# Altium PCB STM8S207R8T6 Header Board.PcbDoc
Units mm, origin at the board's own origin, x right, y up, seen from the top; angles counter-clockwise.
Board outline 46.51 x 76.43 mm, 2 copper layers (Top Layer, Bottom Layer); 32 components, 65 nets, 209 pads, 47 vias.
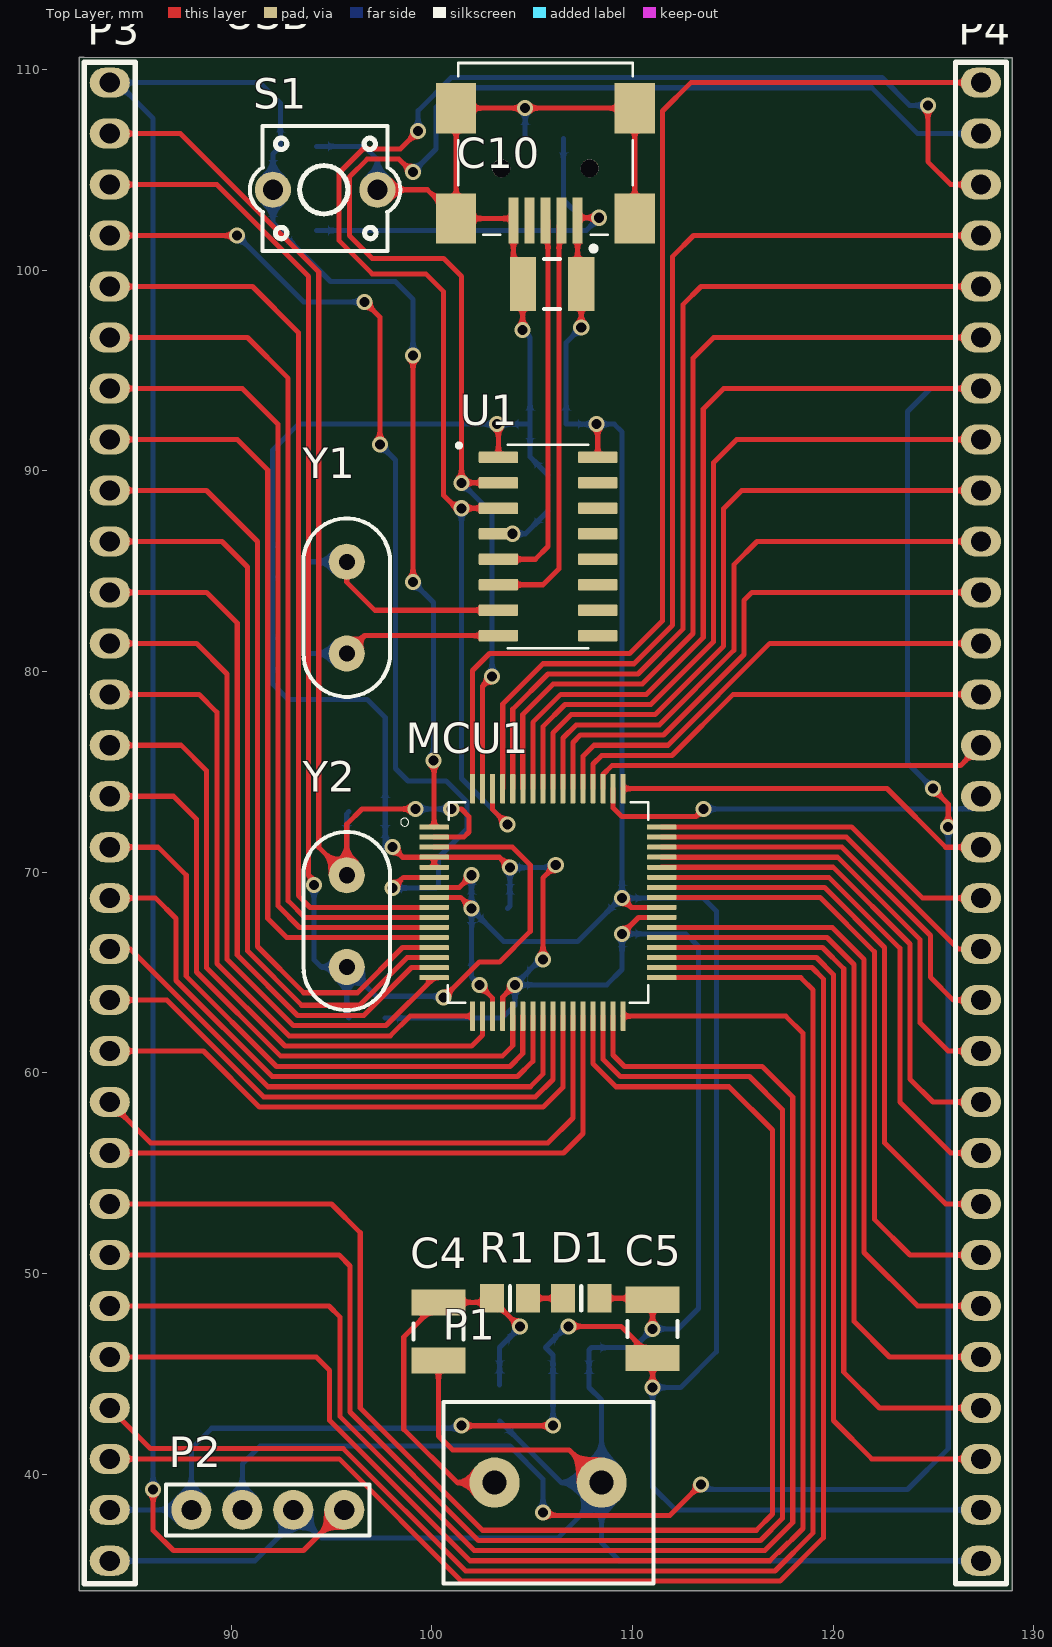
[diagram p0: Top Layer view]
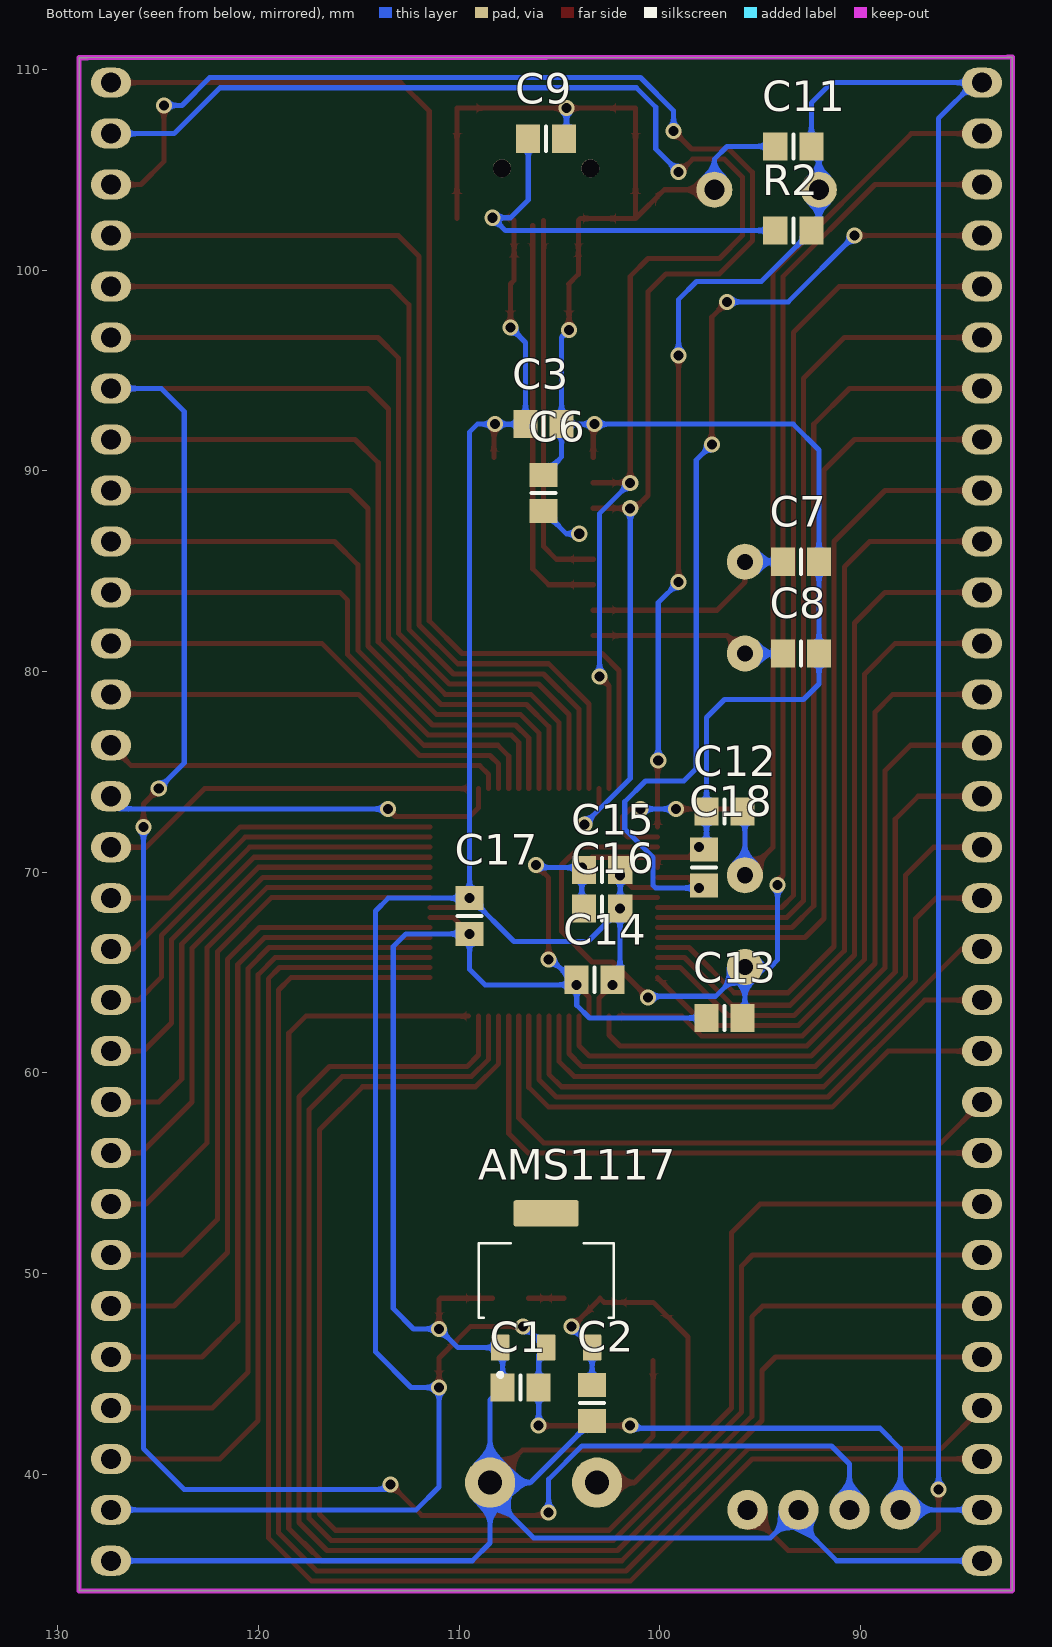
[diagram p1: Bottom Layer view, seen from below]

## Layer stack, top to bottom
Top Solder: solder mask 0.0102, Solder Resist, Dk 3.5
Top Layer: signal copper 0.0356
Dielectric 1: dielectric 0.32, FR-4, Dk 4.8
Bottom Layer: signal copper 0.0356
Bottom Solder: solder mask 0.0102, Solder Resist, Dk 3.5

## Board outline
82.423,34.219 82.451,34.191 128.933,34.191 128.933,110.589 128.524,110.589 82.677,110.617 82.423,110.617

## Design rules (kind name [scope] priority, off if disabled: settings)
Clearance [All] p1: gap=0.254 ignorepadtopadclearanceinfootprint=FALSE except(0: Arc-Hole Track-Hole SMDPad-Hole THPad-Hole Via-Hole Fill-Hole Poly-Hole Region-Hole Text-Hole)
PolygonConnect [All] p1: connectstyle=Relief reliefconductorwidth=0.254 reliefentries=4 polygonreliefangle="90 Angle" airgapwidth=0.254
RoutingVias [All] p1: holewidth=0.5 width=0.8 viastyle="Through Hole" minholewidth=0.5 minwidth=0.8 maxholewidth=0.8 maxwidth=1
SolderMaskExpansion [All] p1: expansion=0.102
UnRoutedNet [All] p1: checkbadconnections=TRUE
Width [All] p1: maxlimit=0.254 minlimit=0.254 preferedwidth=0.254
29 further rules are at their usual default settings.

## Components (designator, comment, footprint, x,y, rotation, side; value= is the part's Value field where it differs from the comment)
AMS1117 "AMS1117" SOT229P700X180-4N 105.664,49.657 r90 bottom
C1 "Cap" 6-0805_N 106.934,44.323 r180 bottom value=100nF
C2 "Cap" 6-0805_N 103.378,43.55 r90 bottom value=100nF
C3 "Cap" 6-0805_N 105.791,92.329 r180 bottom value=100nF
C4 "Cap Pol1" C1210_N 100.33,47.117 r270 top value=100uF
C5 "Cap Pol1" C1210_N 110.998,47.244 r90 top value=100uF
C6 "Cap" 6-0805_N 105.791,88.9 r270 bottom value=10nF
C7 "Cap" 6-0805_N 92.964,85.471 r0 bottom value=18pF
C8 "Cap" 6-0805_N 92.964,80.899 r0 bottom value=18pF
C9 "Cap" 6-0805_N 105.664,106.553 r0 bottom value=10nF
C10 "Cap Pol1" C1210_N 105.992,99.314 r180 top value=10uF
C11 "Cap" 6-0805_N 93.345,106.172 r180 bottom value=100nF
C12 "Cap" 6-0805_N 96.774,73.025 r180 bottom value=100pF
C13 "Cap" 6-0805_N 96.774,62.738 r180 bottom value=100pF
C14 "Cap" 6-0805_N 103.251,64.643 r0 bottom value=100nF
C15 "Cap" 6-0805_N 102.87,70.104 r0 bottom value=100nF
C16 "Cap" 6-0805_N 102.87,68.199 r180 bottom value=100nF
C17 "Cap" 6-0805_N 109.474,67.818 r270 bottom value=100nF
C18 "Cap" 6-0805_N 97.79,70.231 r90 bottom value=680nF
D1 "LED0" 6-0805_N 107.442,48.768 r0 top
MCU1 "STM8S207R8T6" QFP50P1200X1200X160-64N 105.779,68.498 r0 top
P1 "Header 2" Terminal2 105.664,39.497 r90 top
P2 "Header 4" HDR1X4 95.631,38.227 r180 top
P3 "Header 30" "Header 30" 84.582,72.009 r0 top
P4 "Header 30" "Header 30" 127.991,72.009 r0 top
R1 "Res1" 6-0805_N 103.886,48.768 r0 top value=1K
R2 "Res1" 6-0805_N 93.345,101.981 r0 bottom value=10K
S1 "SW-PB" RES_B 94.615,104.013 r180 top
U1 "CH340G" SOIC127P600X175-16N 105.791,86.233 r0 top
USB "Header 5" TE_3-1734035-2 105.659,105.077 r180 top
Y1 "XTAL" Xtal 93.434,87.251 r270 top
Y2 "XTAL" Xtal 93.434,71.63 r270 top

## Footprints (in the part's own frame and the unit in brackets; to place one, negate y for a bottom-side part, rotate by r counter-clockwise, add the part's x,y. Pads: shape width x height; smd on the part's side, far side on the other; paste and mask are expansions set on the pad)
6-0805_N [mm] "Chip Resistor, Body 2.0x1.2mm, IPC Medium Density"
  rect 1.2x1.4 smd: 1(-0.9,0) 2(0.9,0)
  silkscreen extent 0,-0.6 0,0.6, body extent -1.07,-0.7 1.07,0.7, height 0.7
C1210_N [mm] "Chip Capacitor, Body 3.2x2.5mm, IPC Medium Density"
  rect 1.3x2.7 smd: 1(-1.45,0) 2(1.45,0)
  silkscreen extent -0.4,-1.25 0.4,1.25, body extent -1.7,-1.35 1.7,1.35, height 1.5
HDR1X4 [mm] "Connector; Header; 4 Position"
  round 2 hole 1: 1(0,0) 2(2.54,0) 3(5.08,0) 4(7.62,0)
  silkscreen extent -1.27,-1.27 8.89,1.27
"Header 30" [mm]
  oval 2x1.5 hole 1: 1(-0.635,37.338) 2(-0.635,34.798) 3(-0.635,32.258) 4(-0.635,29.718) 5(-0.635,27.178) 6(-0.635,24.638) 7(-0.635,22.098) 8(-0.635,19.558) 9(-0.635,17.018) 10(-0.635,14.478) 11(-0.635,11.938) 12(-0.635,9.398) 13(-0.635,6.858) 14(-0.635,4.318) 15(-0.635,1.778) 16(-0.635,-0.762) 17(-0.635,-3.302) 18(-0.635,-5.842) 19(-0.635,-8.382) 20(-0.635,-10.922) 21(-0.635,-13.462) 22(-0.635,-16.002) 23(-0.635,-18.542) 24(-0.635,-21.082) 25(-0.635,-23.622) 26(-0.635,-26.162) 27(-0.635,-28.702) 28(-0.635,-31.242) 29(-0.635,-33.782) 30(-0.635,-36.322)
  silkscreen extent -1.91,-37.46 0.64,38.35, body extent -1.63,-37.34 0.37,38.34, height 2.42
QFP50P1200X1200X160-64N [mm]
  rrect25% 1.47x0.25 smd: 1(-5.67,3.75) 2(-5.67,3.25) 3(-5.67,2.75) 4(-5.67,2.25) 5(-5.67,1.75) 6(-5.67,1.25) 7(-5.67,0.75) 8(-5.67,0.25) 9(-5.67,-0.25) 10(-5.67,-0.75) 11(-5.67,-1.25) 12(-5.67,-1.75) 13(-5.67,-2.25) 14(-5.67,-2.75) 15(-5.67,-3.25) 16(-5.67,-3.75) 33(5.67,-3.75) 34(5.67,-3.25) 35(5.67,-2.75) 36(5.67,-2.25) 37(5.67,-1.75) 38(5.67,-1.25) 39(5.67,-0.75) 40(5.67,-0.25) 41(5.67,0.25) 42(5.67,0.75) 43(5.67,1.25) 44(5.67,1.75) 45(5.67,2.25) 46(5.67,2.75) 47(5.67,3.25) 48(5.67,3.75)
  rrect25% 0.25x1.47 smd: 17(-3.75,-5.67) 18(-3.25,-5.67) 19(-2.75,-5.67) 20(-2.25,-5.67) 21(-1.75,-5.67) 22(-1.25,-5.67) 23(-0.75,-5.67) 24(-0.25,-5.67) 25(0.25,-5.67) 26(0.75,-5.67) 27(1.25,-5.67) 28(1.75,-5.67) 29(2.25,-5.67) 30(2.75,-5.67) 31(3.25,-5.67) 32(3.75,-5.67) 49(3.75,5.67) 50(3.25,5.67) 51(2.75,5.67) 52(2.25,5.67) 53(1.75,5.67) 54(1.25,5.67) 55(0.75,5.67) 56(0.25,5.67) 57(-0.25,5.67) 58(-0.75,5.67) 59(-1.25,5.67) 60(-1.75,5.67) 61(-2.25,5.67) 62(-2.75,5.67) 63(-3.25,5.67) 64(-3.75,5.67)
  silkscreen extent -7.34,-5 5,5, body extent -6,-6 6,6, height 1.58
RES_B [mm]
  round 1.8 hole 1: 1(-2.667,0) 2(2.54,0)
  silkscreen extent -3.82,-3.18 3.69,3.05, body extent -3.18,-3.18 3.05,3.05, height 4
SOIC127P600X175-16N [mm]
  rrect25% 1.97x0.59 smd: 1(-2.475,4.445) 2(-2.475,3.175) 3(-2.475,1.905) 4(-2.475,0.635) 5(-2.475,-0.635) 6(-2.475,-1.905) 7(-2.475,-3.175) 8(-2.475,-4.445) 9(2.475,-4.445) 10(2.475,-3.175) 11(2.475,-1.905) 12(2.475,-0.635) 13(2.475,0.635) 14(2.475,1.905) 15(2.475,3.175) 16(2.475,4.445)
  silkscreen extent -4.54,-5.06 2,5.13, body extent -3,-4.95 3,4.95, height 1.75
SOT229P700X180-4N [mm]
  rrect15% 1.31x0.93 smd: 1(-3.345,2.29) 2(-3.345,0) 3(-3.345,-2.29)
  rrect15% 1.31x3.24 smd: 4(3.345,0)
  silkscreen extent -4.8,-3.36 1.86,3.36, body extent -3.63,-3.25 3.37,3.25, height 1.77
TE_3-1734035-2 [mm]
  rect 0.5x2.3 smd: 1(-1.6,2.6) 2(-0.8,2.6) 3(0,2.6) 4(0.8,2.6) 5(1.6,2.6)
  rect 2x2.5 smd: SH1(-4.45,2.5) SH2(4.45,2.5) SH3(-4.45,-3) SH4(4.45,-3)
  round 0.9 hole 0.9 unplated: ""(-2.2,0) ""(2.2,0)
  silkscreen extent -4.35,-5.25 4.35,4.1, body extent -5,-6.07 5,3.43, height 4.7
Terminal2 [mm]
  round 2.5 hole 1.2: 1(0.087,2.54) 2(0.087,-2.794)
  silkscreen extent -4.95,-5.37 4.11,5.08, body extent -6.06,-5.13 6.44,5.37, height 15
Xtal [mm]
  round 1.8 hole 0.8: 1(1.78,2.324) 2(6.352,2.324)
  silkscreen extent -0.38,0.16 8.51,4.49, body extent -1.61,-0.13 9.74,4.87, height 2.1

## Part data
AMS1117: "UNO PLUS Arduino R3 Shield, Xbee Arduino IDE Wheeled Robotics Kit", Package="SOT-223 Seeed Technology", Availability=Unavailable, MF="Seeed Technology", MP=AMS1117, Price=None, SnapEDA_Link=https://www.snapeda.com/parts/AMS1117/Seeed%20Technology%20Co.%2C%20Ltd/view-part/184428/?ref=snap
C1 C2 C3 C6 C7 C8 C9 C11 C12 C13 C14 C15 C16 C17 C18: "Capacitor", LatestRevisionDate=17-Jul-2002, LatestRevisionNote="Re-released for DXP Platform.", PackageDescription="Radial Cap, Thru-Hole; 2 Leads; 0.3 in Pin Spacing", PackageReference=RAD-0.3, Published=8-Jun-2000, Publisher="Altium Limited"
C4 C5 C10: "Polarized Capacitor (Radial)", LatestRevisionDate=17-Jul-2002, LatestRevisionNote="Re-released for DXP Platform.", PackageDescription="Polarized Capacitor (Radial); 2 Leads", PackageReference=RB7.6-15, Published=8-Jun-2000, Publisher="Altium Limited"
D1: "Typical INFRARED GaAs LED", LatestRevisionDate=08-Jul-2005, LatestRevisionNote="Mech Layer 1 removed.", PackageDescription="LED; 2 Leads", PackageReference=LED-0, Published=8-Jun-2000, Publisher="Altium Limited"
P1: "Header, 2-Pin", LatestRevisionDate=17-Jul-2002, LatestRevisionNote="Re-released for DXP Platform.", Publisher="Altium Limited"
P2: "Header, 4-Pin", LatestRevisionDate=17-Jul-2002, LatestRevisionNote="Re-released for DXP Platform.", Publisher="Altium Limited"
P3 P4: "Header, 30-Pin", LatestRevisionDate=17-Jul-2002, LatestRevisionNote="Re-released for DXP Platform.", Publisher="Altium Limited"
R1 R2: "Resistor", LatestRevisionDate=17-Jul-2002, LatestRevisionNote="Re-released for DXP Platform.", PackageDescription="Axial Device, Thru-Hole; 2 Leads; 0.3 in Pin Spacing", PackageReference=AXIAL-0.3, Published=8-Jun-2000, Publisher="Altium Limited"
S1: "Switch", LatestRevisionDate=17-Jul-2002, LatestRevisionNote="Re-released for DXP Platform.", PackageDescription="Switch; 2 Leads", PackageReference=SPST-2, Published=24-Mar-1999, Publisher="Altium Limited"
USB: "Header, 5-Pin", LatestRevisionDate=17-Jul-2002, LatestRevisionNote="Re-released for DXP Platform.", Publisher="Altium Limited"
Y1 Y2: "Crystal Oscillator", LatestRevisionDate=17-Jul-2002, LatestRevisionNote="Re-released for DXP Platform.", PackageDescription="Crystal, Thru-Hole; 2 Leads; Body 3.1 x 8.2 mm (Dia.xH)", PackageReference=R38, Published=8-Jun-2000, Publisher="Altium Limited"

## Via types
v1: diameter 0.8, hole 0.5, Top Layer to Bottom Layer, 47 vias

## Nets (pads, with @x,y where several pads share a name; then routed paths per layer and width w, separated by ;. In a path a pad name is that pad's centre, name@x,y a point inside that pad or via, vN(x,y) a via of type N, cw(c..) or ccw(c..) an arc to the next point about the centre after c; other vN are vias at no path point)
5v: AMS1117.2 C1.2 C3.1 C5.1 C9.2 C10.1 C14.1 C15.1 C16.2 C17.1 MCU1.7 MCU1.8 MCU1.19 MCU1.40 P2.4 P3.29 P4.29 R2.2 U1.16 USB.1 | length 172.2
  Top Layer w0.254: MCU1.8 101.432,68.748 v1(101.981,68.199) ; MCU1.7 101.379,69.248 v1(101.981,69.85) ; v1(101.473,42.418) v1(106.045,42.418) ; v1(102.362,64.389) 103.029,63.722 MCU1.19 ; v1(106.807,47.371) 109.421,47.371 C5.1 v1(110.998,44.323) ; v1(107.442,97.155) C10.1 107.259,99.497 USB.1 107.398,102.616 v1(108.331,102.616) ; v1(108.204,92.329) 108.266,92.267 U1.16 ; v1(109.474,68.707) 109.933,68.248 MCU1.40
  Bottom Layer w0.254: P3.29 P2.4 88.011,41.275 89.027,42.291 101.346,42.291 v1(101.473,42.418) ; R2.2 107.696,101.981 v1(108.331,102.616) 107.442,102.616 106.553,103.505 106.553,106.542 C9.2 ; C16.2 C15.1@101.97,69.85 ; v1(101.981,68.199) C16.2@101.981,68.149 ; v1(102.362,64.389) 101.981,64.77 C16.2@101.981,68.149 ; v1(106.045,42.418) 106.034,42.429 C1.2 106.034,45.942 AMS1117.2 106.723,47.371 v1(106.807,47.371) ; v1(107.442,97.155) 106.691,96.404 C3.1 v1(108.204,92.329) 109.093,92.329 109.474,91.948 v1(109.474,68.707) ; P4.29 112.141,38.227 110.998,39.37 v1(110.998,44.323) 112.395,44.323 114.173,46.101 114.173,68.072 113.538,68.707 v1(109.474,68.707) ; C16.2@101.981,68.149 103.582,66.548 107.265,66.548 109.424,68.707 v1(109.474,68.707)
D+: U1.5 USB.3 | length 19
  Top Layer w0.254: U1.5 105.156,85.598 105.786,86.228 USB.3@105.786,102.477
D-: U1.6 USB.2 | length 20.4
  Top Layer w0.254: U1.6 105.537,84.328 106.332,85.123 USB.2@106.332,102.223
GND: AMS1117.1 C1.1 C2.1 C3.2 C4.2 C5.2 C6.1 C7.1 C8.1 C9.1 C10.2 C11.1 C12.1 C13.1 C14.2 C15.2 C16.1 C17.2 C18.2 D1.2 MCU1.4 MCU1.5 MCU1.20 MCU1.39 P1.2 P2.2 P3.30 P4.30 S1.1 U1.1 USB.5 USB.SH1 USB.SH2 USB.SH3 USB.SH4 | length 232.3
  Top Layer w0.254: S1.1 99.773,104.013 USB.SH2 ; v1(98.044,71.247) 98.543,70.748 MCU1.4 ; MCU1.5 MCU1.4 ; C4.2 100.33,41.91 101.025,41.215 106.827,41.215 P1.2 ; v1(103.251,92.329) 103.316,92.264 U1.1 ; MCU1.20 103.529,63.778 v1(104.14,64.389) ; v1(103.886,70.231) 103.369,70.748 MCU1.4 ; v1(104.521,97.028) 104.521,99.293 C10.2 104.059,99.797 USB.5 103.959,102.577 USB.SH2 ; v1(105.537,65.659) 105.537,69.723 v1(106.172,70.358) ; D1.2 110.924,48.768 C5.2 v1(110.998,47.244) ; v1(109.474,66.929) 110.293,67.748 MCU1.39 ; USB.SH1 USB.SH3 v1(104.648,108.077) USB.SH4 USB.SH2
  Bottom Layer w0.254: P3.30 91.186,35.687 93.091,37.592 P2.2 94.488,36.83 106.299,36.83 P1.2@108.458,38.989 ; C11.1 96.647,106.172 97.282,105.537 S1.1 ; C13.1 103.505,62.738 104.14,63.373 v1(104.14,64.389) ; C18.2@97.674,71.247 C12.1 97.674,77.713 96.774,78.613 92.837,78.613 92.064,79.386 C8.1 C7.1 92.064,91.048 93.345,92.329 C3.2 ; C2.1 106.444,39.584 P1.2 ; C16.1 103.886,68.315 v1(103.886,70.231) 106.045,70.231 v1(106.172,70.358) ; v1(104.521,97.028) 104.891,96.658 C3.2 ; v1(104.648,108.077) 104.648,106.669 C9.1 ; v1(105.537,65.659) 105.41,65.659 v1(104.14,64.389) ; C6.1 104.891,90.7 C3.2 ; P4.30 109.347,35.687 108.458,36.576 P1.2@108.458,38.989 ; v1(104.14,64.389) 108.712,64.389 109.474,65.151 v1(109.474,66.929) 112.649,66.929 113.284,66.294 113.284,48.26 112.268,47.244 v1(110.998,47.244) 110.066,46.312 AMS1117.1 107.834,46.192 C1.1 108.458,43.699 P1.2 ; P1.2@108.458,38.989 P1.2
NetC6_2: C6.2 U1.4 | length 2.2
  Bottom Layer w0.254: v1(104.013,86.868) 104.659,86.868 C6.2
NetC7_2: C7.2 U1.7 Y1.1 | length 11
  Top Layer w0.254: Y1.1 95.758,84.455 97.155,83.058 U1.7
  Bottom Layer w0.254: C7.2 Y1.1
NetC8_2: C8.2 U1.8 Y1.2 | length 9.8
  Top Layer w0.254: Y1.2 96.647,81.788 U1.8
  Bottom Layer w0.254: C8.2 Y1.2
NetD1_1: D1.1 R1.2 | length 1.8
  Top Layer w0.254: R1.2 D1.1
PA1: C12.2 MCU1.2 P3.2 Y2.1 | length 58.9
  Top Layer w0.254: P3.2 87.469,106.807 94.361,99.915 94.361,71.247 Y2.1 95.758,72.39 96.52,73.152 v1(99.187,73.152) ; MCU1.2 101.593,71.748 101.854,72.009 101.854,72.771 101.473,73.152 v1(100.965,73.152)
  Bottom Layer w0.254: Y2.1 95.758,72.909 C12.2 ; v1(99.187,73.152) v1(100.965,73.152)
PA2: C13.2 MCU1.3 P3.3 Y2.2 | length 70.2
  Top Layer w0.254: P3.3 89.281,104.267 93.853,99.695 93.853,69.85 94.126,69.577 v1(94.126,69.361) ; Y2.2@95.758,65.024 Y2.2 ; MCU1.3 104.012,71.248 104.902,70.358 104.902,67.056 103.378,65.532 102.362,65.532 v1(100.584,63.754)
  Bottom Layer w0.254: v1(94.126,69.361) 94.126,65.64 94.488,65.278 Y2.2 ; C13.2 95.758,62.854 Y2.2 ; v1(100.584,63.754) 100.519,63.819 97.217,63.819 Y2.2
PA3: MCU1.9 P3.5 | length 45.4
  Top Layer w0.254: P3.5 91.059,99.187 93.345,96.901 93.345,68.834 93.931,68.248 MCU1.9
PA4: MCU1.10 P3.6 | length 43.4
  Top Layer w0.254: P3.6 90.805,96.647 92.837,94.615 92.837,68.58 93.669,67.748 MCU1.10
PA5: MCU1.11 P3.7 | length 41.3
  Top Layer w0.254: P3.7 90.551,94.107 92.329,92.329 92.329,68.326 93.407,67.248 MCU1.11
PA6: MCU1.12 P3.8 | length 39.5
  Top Layer w0.254: P3.8 90.297,91.567 91.821,90.043 91.821,67.691 92.764,66.748 MCU1.12
PB0: MCU1.30 P3.24 | length 76.6
  Top Layer w0.254: P3.24 95.377,50.927 95.921,50.383 95.921,43.097 102.315,36.703 116.376,36.703 117.475,37.802 117.475,58.166 115.824,59.817 109.391,59.817 108.529,60.679 MCU1.30
PB1: MCU1.29 P3.23 | length 77
  Top Layer w0.254: P3.23 94.996,53.467 96.429,52.034 96.429,43.307 102.525,37.211 116.165,37.211 116.967,38.013 116.967,57.15 114.808,59.309 109.18,59.309 108.029,60.46 MCU1.29
PB2: MCU1.28 P3.22 | length 29.8
  Top Layer w0.254: P3.22 106.553,56.007 107.529,56.983 MCU1.28
PB3: MCU1.27 P3.21 | length 29.5
  Top Layer w0.254: P3.21 85.979,56.515 105.791,56.515 107.029,57.753 MCU1.27
PB4: MCU1.26 P3.20 | length 27.7
  Top Layer w0.254: P3.20 88.617,61.087 91.411,58.293 105.537,58.293 106.529,59.285 MCU1.26
PB5: MCU1.25 P3.19 | length 27.6
  Top Layer w0.254: P3.19 86.796,63.627 91.622,58.801 105.156,58.801 106.029,59.674 MCU1.25
PB6: MCU1.24 P3.18 | length 27.6
  Top Layer w0.254: P3.18 84.974,66.167 91.832,59.309 104.902,59.309 105.529,59.936 MCU1.24
PB7: MCU1.23 P3.17 | length 29.1
  Top Layer w0.254: P3.17 86.233,68.707 87.249,67.691 87.249,64.611 92.043,59.817 104.267,59.817 105.029,60.579 MCU1.23
PC1: MCU1.34 P3.28 | length 75.1
  Top Layer w0.254: P3.28 95.377,40.767 101.473,34.671 117.348,34.671 119.507,36.83 119.507,64.687 118.946,65.248 MCU1.34
PC2: MCU1.35 P4.28 | length 39.3
  Top Layer w0.254: MCU1.35 119.164,65.748 120.015,64.897 120.015,42.672 121.92,40.767 P4.28
PC3: MCU1.36 P4.27 | length 37.2
  Top Layer w0.254: MCU1.36 119.47,66.248 120.523,65.195 120.523,45.085 122.301,43.307 P4.27
PC4: MCU1.37 P4.26 | length 35
  Top Layer w0.254: MCU1.37 119.688,66.748 121.031,65.405 121.031,47.625 122.809,45.847 P4.26
PC5: MCU1.38 P4.25 | length 32.3
  Top Layer w0.254: MCU1.38 119.95,67.248 121.539,65.659 121.539,51.054 124.206,48.387 P4.25
PC6: MCU1.41 P4.24 | length 31.1
  Top Layer w0.254: MCU1.41 119.343,68.748 122.047,66.044 122.047,52.705 123.825,50.927 P4.24
PC7: MCU1.42 P4.23 | length 28.1
  Top Layer w0.254: MCU1.42 119.561,69.248 122.555,66.254 122.555,56.515 125.603,53.467 P4.23
PD0: MCU1.57 P4.8 | length 36.1
  Top Layer w0.254: MCU1.57 105.529,77.252 106.636,78.359 110.907,78.359 114.03,81.482 114.03,90.408 115.189,91.567 P4.8
PD2: MCU1.59 P4.6 | length 42.3
  Top Layer w0.254: MCU1.59 104.529,77.859 106.045,79.375 110.486,79.375 113.014,81.903 113.014,95.615 114.046,96.647 P4.6
PD3: MCU1.60 P4.5 | length 45.5
  Top Layer w0.254: MCU1.60 104.029,78.121 105.791,79.883 110.276,79.883 112.506,82.113 112.506,98.282 113.411,99.187 P4.5
PD4: MCU1.61 P4.4 | length 48.5
  Top Layer w0.254: MCU1.61 103.529,78.383 105.537,80.391 110.065,80.391 111.998,82.324 111.998,100.695 113.03,101.727 P4.4
PD7: MCU1.64 P4.1 | length 58.2
  Top Layer w0.254: MCU1.64 102.029,80.058 102.87,80.899 109.855,80.899 111.49,82.534 111.49,107.934 112.903,109.347 P4.1
PE0: MCU1.56 P4.9 | length 33.1
  Top Layer w0.254: MCU1.56 106.029,76.946 106.934,77.851 111.118,77.851 114.538,81.271 114.538,88.122 115.443,89.027 P4.9
PE1: MCU1.55 P4.10 | length 29.9
  Top Layer w0.254: MCU1.55 106.529,76.684 107.188,77.343 111.328,77.343 115.046,81.061 115.046,85.328 116.205,86.487 P4.10
PE2: MCU1.54 P4.11 | length 27.3
  Top Layer w0.254: MCU1.54 107.029,76.466 107.398,76.835 111.538,76.835 115.554,80.851 115.554,83.55 115.951,83.947 P4.11
PE3: MCU1.53 P4.12 | length 23.8
  Top Layer w0.254: MCU1.53 107.529,75.779 108.077,76.327 111.76,76.327 116.84,81.407 P4.12
PE4: MCU1.52 P4.13 | length 22
  Top Layer w0.254: MCU1.52 108.029,75.39 108.458,75.819 111.97,75.819 115.018,78.867 P4.13
PE5: MCU1.33 P3.27 | length 74.1
  Top Layer w0.254: P3.27 85.979,41.275 95.587,41.275 101.683,35.179 117.094,35.179 118.999,37.084 118.999,64.135 118.386,64.748 MCU1.33
PE6: MCU1.32 P3.26 | length 75.5
  Top Layer w0.254: P3.26 94.234,45.847 94.905,45.176 94.905,42.676 101.894,35.687 116.84,35.687 117.729,36.576 ; MCU1.32 117.639,62.828 118.491,61.976 118.491,37.294 117.306,36.11
PE7: MCU1.31 P3.25 | length 75.5
  Top Layer w0.254: P3.25 94.869,48.387 95.413,47.843 95.413,42.886 102.104,36.195 116.586,36.195 117.983,37.592 117.983,58.801 116.459,60.325 109.601,60.325 109.029,60.897 MCU1.31
PF0: MCU1.22 P3.16 | length 30.2
  Top Layer w0.254: P3.16 86.36,71.247 87.757,69.85 87.757,64.821 92.253,60.325 103.886,60.325 104.529,60.968 MCU1.22
PF3: MCU1.17 P3.13 | length 32.9
  Top Layer w0.254: P3.13 88.392,78.867 89.281,77.978 89.281,65.452 92.884,61.849 97.928,61.849 98.907,62.828 MCU1.17@102.023,62.828
PF4: MCU1.16 P3.12 | length 33.4
  Top Layer w0.254: P3.12 88.265,81.407 89.789,79.883 89.789,65.663 93.095,62.357 97.718,62.357 MCU1.16
PF5: MCU1.15 P3.11 | length 35.6
  Top Layer w0.254: P3.11 88.773,83.947 90.297,82.423 90.297,65.873 93.305,62.865 96.603,62.865 98.986,65.248 MCU1.15
PF6: MCU1.14 P3.10 | length 37.9
  Top Layer w0.254: P3.10 89.535,86.487 90.805,85.217 90.805,66.084 93.516,63.373 96.393,63.373 98.768,65.748 MCU1.14
PF7: MCU1.13 P3.9 | length 39.3
  Top Layer w0.254: P3.9 88.773,89.027 91.313,86.487 91.313,66.294 93.61,63.997 96.289,63.997 98.54,66.248 MCU1.13
PG0: MCU1.43 P4.22 | length 26.1
  Top Layer w0.254: MCU1.43 119.78,69.748 123.317,66.211 123.317,58.547 125.857,56.007 P4.22
PG1: MCU1.44 P4.21 | length 24.7
  Top Layer w0.254: MCU1.44 119.998,70.248 123.825,66.421 123.825,59.69 124.968,58.547 P4.21
PG2: MCU1.45 P4.20 | length 22.3
  Top Layer w0.254: MCU1.45 120.22,70.748 124.333,66.635 124.333,62.484 125.73,61.087 P4.20
PG3: MCU1.46 P4.19 | length 20.3
  Top Layer w0.254: MCU1.46 120.439,71.248 124.841,66.846 124.841,64.77 125.984,63.627 P4.19
PG4: MCU1.47 P4.18 | length 18.2
  Top Layer w0.254: MCU1.47 120.657,71.748 126.238,66.167 P4.18
PG5: MCU1.49 P4.16 | length 19
  Top Layer w0.254: MCU1.49 122.682,74.168 125.603,71.247 P4.16
PG6: MCU1.50 P4.15 | length 19.9
  Top Layer w0.254: MCU1.50 109.029,73.216 109.474,72.771 113.157,72.771 v1(113.538,73.152)
  Bottom Layer w0.254: v1(113.538,73.152) 126.721,73.152 P4.15
PG7: MCU1.51 P4.14 | length 20.1
  Top Layer w0.254: MCU1.51 108.529,74.874 108.966,75.311 126.34,75.311 P4.14
PI0: MCU1.48 P4.17 | length 17.4
  Top Layer w0.254: MCU1.48@111.449,72.254 111.458,72.263 120.904,72.263 124.46,68.707 P4.17
RESET: C11.2 MCU1.1 P2.1 P3.1 R2.1 S1.2 | length 134.3
  Top Layer w0.254: v1(86.106,39.243) 86.106,37.211 87.122,36.195 93.599,36.195 P2.1 ; v1(99.06,84.455) v1(99.06,95.758) ; v1(100.076,75.565) 100.109,75.532 MCU1.1
  Bottom Layer w0.254: P3.1 P3.1@84.328,109.347 ; v1@86.106,38.989 v1(86.106,39.243) 86.106,107.569 P3.1@84.328,109.347 ; v1(99.06,84.455) 100.076,83.439 v1(100.076,75.565) ; v1(99.06,95.758) 99.06,98.552 98.171,99.441 94.946,99.441 92.445,101.942 R2.1 92.075,102.351 S1.2 92.075,105.802 C11.2 92.445,108.342 91.44,109.347 P3.1@84.328,109.347
RX: MCU1.63 P4.2 U1.2 | length 73.5
  Top Layer w0.254: v1(99.06,104.902) 98.996,104.902 98.361,105.537 96.774,105.537 95.885,104.648 95.885,101.727 97.028,100.584 100.584,100.584 101.473,99.695 v1(101.473,89.408) U1.2 ; MCU1.63 102.529,79.288 v1(102.997,79.756)
  Bottom Layer w0.254: v1(99.06,104.902) 100.203,106.045 100.203,108.121 101.175,109.093 121.92,109.093 124.206,106.807 P4.2 ; v1(101.473,89.408) 102.997,87.884 v1(102.997,79.756)
SWIM: MCU1.58 P2.3 P4.7 | length 137.7
  Top Layer w0.254: MCU1.58 105.029,77.47 106.426,78.867 110.697,78.867 113.522,81.692 113.522,93.091 114.538,94.107 P4.7 ; v1(105.537,38.1) 105.684,37.953 111.867,37.953 v1(113.411,39.497) ; v1(124.968,74.168) 125.73,73.406 v1(125.73,72.263)
  Bottom Layer w0.254: P2.3 90.551,40.513 91.44,41.402 103.886,41.402 105.537,39.751 v1(105.537,38.1) ; v1(113.411,39.497) 113.665,39.243 123.698,39.243 125.73,41.275 v1(125.73,72.263) ; v1(124.968,74.168) 123.698,75.438 123.698,92.964 124.841,94.107 P4.7
TX: MCU1.62 P4.3 U1.3 | length 80
  Top Layer w0.254: v1(99.314,106.934) 98.425,106.045 96.564,106.045 95.421,104.902 95.377,104.902 95.377,101.473 97.028,99.822 99.695,99.822 100.584,98.933 100.584,88.773 101.219,88.138 v1(101.473,88.138) U1.3 ; MCU1.62 103.029,73.12 v1(103.759,72.39) ; v1(124.714,108.204) 124.714,105.41 125.857,104.267 P4.3
  Bottom Layer w0.254: v1(99.314,106.934) 99.314,107.95 100.965,109.601 122.428,109.601 123.813,108.216 124.702,108.216 v1(124.714,108.204) ; v1(101.473,88.138) 101.473,74.676 v1(103.759,72.39)
VCAP: C18.1 MCU1.6 P3.4 | length 51.6
  Top Layer w0.254: P3.4 v1(90.297,101.727) ; v1(96.647,98.425) 97.409,97.663 v1(97.409,91.313) ; v1(98.044,69.215) 98.577,69.748 MCU1.6
  Bottom Layer w0.254: v1(90.297,101.727) 93.599,98.425 v1(96.647,98.425) ; v1(97.409,91.313) 98.182,90.54 98.182,75.173 98.806,74.549 100.711,74.549 101.746,73.514 101.746,72.155 100.33,70.739 100.33,69.342 100.203,69.215 v1(98.044,69.215)
Vin: AMS1117.3 C2.2 C4.1 P1.1 R1.1 | length 20.8
  Top Layer w0.254: P1.1 101.259,39.584 98.599,42.244 98.599,46.836 C4.1 102.785,48.567 R1.1 102.986,48.729 104.344,47.371 v1(104.394,47.371)
  Bottom Layer w0.254: C2.2 103.374,44.454 AMS1117.3 104.394,47.332 v1(104.394,47.371)
VREF+: MCU1.18 P3.14 | length 31.7
  Top Layer w0.254: P3.14 87.503,76.327 88.773,75.057 88.773,65.242 92.674,61.341 101.981,61.341 102.529,61.889 MCU1.18
VREF-: MCU1.21 P3.15 | length 31.6
  Top Layer w0.254: P3.15 87.122,73.787 88.265,72.644 88.265,65.031 92.463,60.833 103.505,60.833 104.029,61.357 MCU1.21
pads on no net: AMS1117.4 U1.9 U1.10 U1.11 U1.12 U1.13 U1.14 U1.15 USB. USB.4

## Keep-outs
Bottom Layer:
  the board outline again, w0.254

## Text inside footprints (layer, text, board x,y; h text height)
USB: Mechanical 13 "PCB EDGE" at 99.404,110.131 h1.27 r180